# Altium PCB PCB1.PcbDoc
Units mil, origin at the board's own origin, x right, y up, seen from the top; angles counter-clockwise.
Board outline 6000 x 4000 mil, 2 copper layers (Top Layer, Bottom Layer); 48 components, 84 nets, 262 pads, 0 vias.
Unrouted connection lines stored in the file: 160.
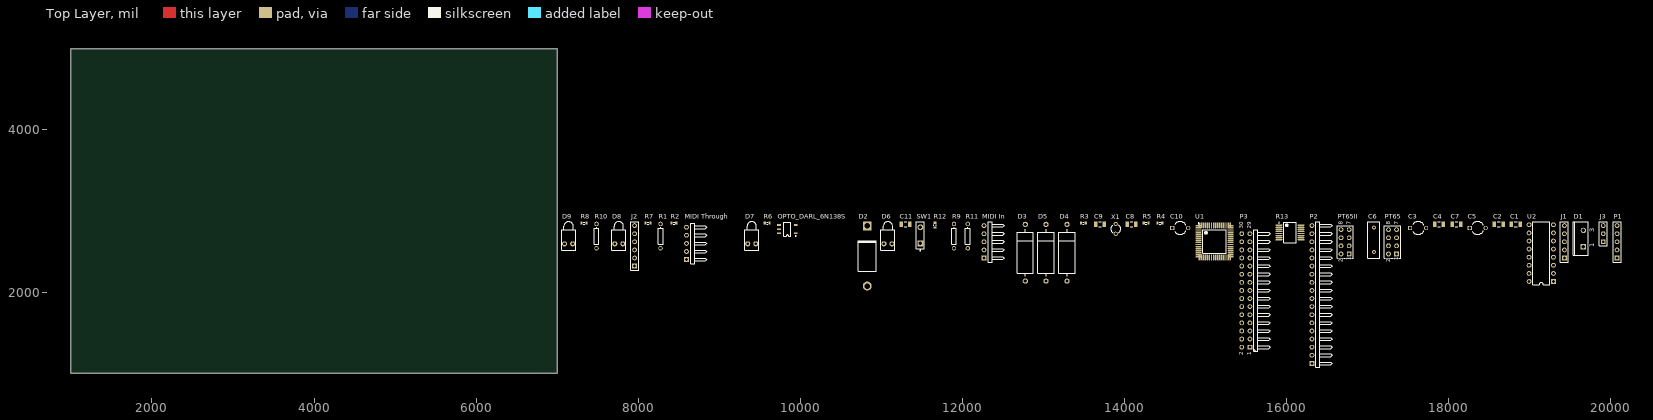
[diagram p0: Top Layer view]
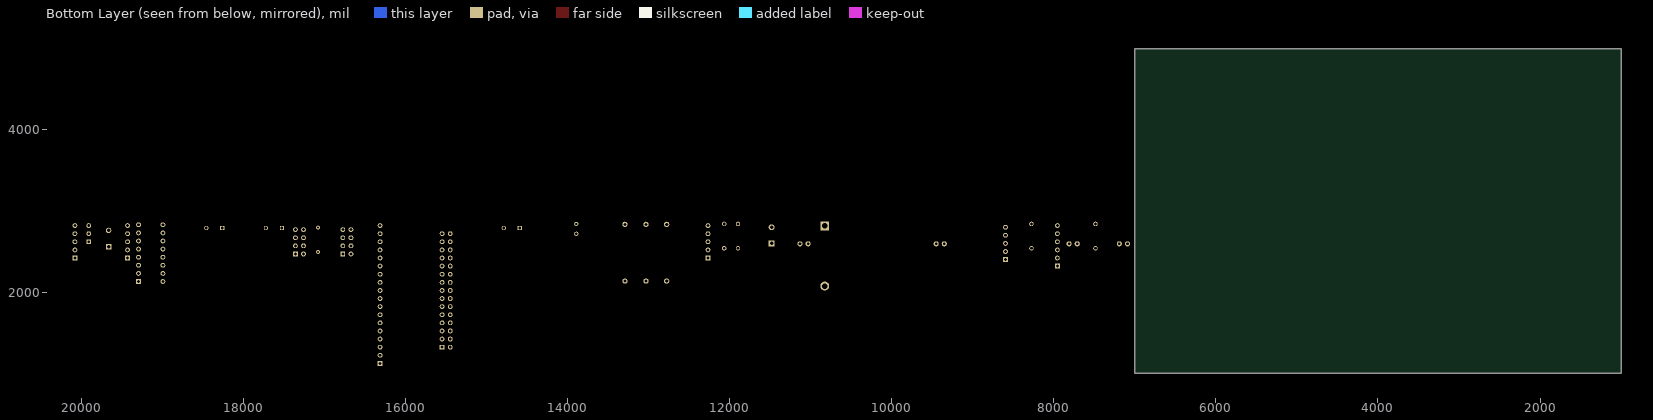
[diagram p1: Bottom Layer view, seen from below]

## Layer stack, top to bottom
Top Layer: signal copper 1.4
Dielectric: dielectric 12.6, FR-4, Dk 4.8
Bottom Layer: signal copper 1.4

## Board outline
1000,1000 7000,1000 7000,5000 1000,5000

## Design rules (kind name [scope] priority, off if disabled: settings)
Clearance [All] p1: gap=10
PolygonConnect [All] p1: connectstyle=Relief reliefconductorwidth=10 reliefentries=4 polygonreliefangle="90 Angle"
RoomDefinition Sheet2 [InComponentClass('Sheet2')] p1: confinementstyle=ConfineIn formatcopy=TRUE lockcomponents=FALSE outline 7045,1060 20135,1060 20135,2980 7045,2980
RoutingVias [All] p1: holewidth=28 width=50 viastyle="Through Hole" minholewidth=28 minwidth=50 maxholewidth=28 maxwidth=50
SilkscreenOverComponentPads [All] p1: minsilkscreentomaskgap=10
SolderMaskExpansion [All] p1: expansion=4
Width [All] p1: maxlimit=10 minlimit=10 preferedwidth=10
27 further rules are at their usual default settings.

## Components (designator, comment, footprint, x,y, rotation, side; value= is the part's Value field where it differs from the comment)
C1 "" C1206 18825,2835 r0 top
C2 "" C1206 18615,2835 r0 top
C3 "" CAPR5-4X5 17620,2790 r0 top
C4 "0.1uF" C1206 17880,2835 r0 top
C5 "4.7uF" CAPR5-4X5 18355,2790 r0 top
C6 "0.1uF" RAD-0.3 17075,2645 r90 top
C7 "0.1uF" C1206 18095,2835 r0 top
C8 "" C1206 14085,2835 r0 top
C9 "" C1206 13695,2835 r0 top
C10 "4.7uF" CAPR5-4X5 14685,2790 r0 top
C11 "" C1206 11295,2835 r0 top
D1 "1N5817" TO-220AC 19660,2660 r90 top
D2 "Diode 1N5408" DO-201AD 10825,2445 r90 top
D3 "AZ2015-01L" DIODE-0.7 12775,2485 r90 top
D4 "AZ2015-01L" DIODE-0.7 13290,2485 r90 top
D5 "AZ2015-01L" DIODE-0.7 13030,2485 r90 top
D6 "GREEN" LED-1 11080,2595 r90 top
D7 "RED" LED-1 9400,2595 r90 top
D8 "GREEN" LED-1 7760,2595 r90 top
D9 "RED" LED-1 7140,2595 r90 top
J1 "" HDR1X5 19425,2420 r90 top
J2 "CON6" HDR1X6 7955,2320 r90 top
J3 "Battery" HDR1X3 19905,2620 r90 top
"MIDI In" "Header 5H" HDR1X5H 12265,2420 r90 top
"MIDI Through" "Header 5H" HDR1X5H 8595,2400 r90 top
OPTO_DARL_6N138S "Optoisolator2" SOP5(6) 9840,2775 r90 top
P1 "Header 5" HDR1X5 20075,2420 r90 top
P2 "Header 18H" HDR1X18H 16310,1120 r90 top
P3 "Header 15X2H" HDR2X15H 15545,1320 r90 top
PT65 "PT65" HDR2X4 17355,2470 r90 top
PT65II "PT65II" HDR2X4 16770,2470 r90 top
R1 "Res1" AXIAL-0.3 8275,2690 r90 top
R2 "" J1-0603 8440,2850 r0 top
R3 "" J1-0603 13490,2850 r0 top
R4 "30" J1-0603 14435,2850 r0 top
R5 "30" J1-0603 14265,2850 r0 top
R6 "Res3" J1-0603 9590,2850 r0 top
R7 "Res3" J1-0603 8120,2850 r0 top
R8 "Res3" J1-0603 7330,2850 r0 top
R9 "Res1" AXIAL-0.3 11895,2690 r90 top
R10 "Res1" AXIAL-0.3 7485,2690 r90 top
R11 "Res1" AXIAL-0.3 12065,2690 r90 top
R12 "Res3" J1-0603 11660,2825 r90 top
R13 "Res Pack4" SSOP16_N 16040,2735 r0 top
SW1 "" SPST-2 11480,2700 r90 top
U1 "MCU" MG84FG516 15110,2625 r0 top
U2 "SN74LS165N" 648-08 19140,2480 r90 top
X1 "22.1184MHz" R38 13890,2780 r0 top

## Footprints (in the part's own frame and the unit in brackets; to place one, negate y for a bottom-side part, rotate by r counter-clockwise, add the part's x,y. Pads: shape width x height; smd on the part's side, far side on the other; paste and mask are expansions set on the pad)
648-08 [mm] "DIP; 16 Leads; Row Spacing 7.62 mm; Pitch 2.54 mm"
  rect 1.5x1.5 hole 0.9: 1(-8.89,-3.81)
  round 1.5 hole 0.9: 2(-6.35,-3.81) 3(-3.81,-3.81) 4(-1.27,-3.81) 5(1.27,-3.81) 6(3.81,-3.81) 7(6.35,-3.81) 8(8.89,-3.81) 9(8.89,3.81) 10(6.35,3.81) 11(3.81,3.81) 12(1.27,3.81) 13(-1.27,3.81) 14(-3.81,3.81) 15(-6.35,3.81) 16(-8.89,3.81)
  silkscreen extent -9.85,-2.65 9.85,2.65
AXIAL-0.3 [mm] "Axial Device, Thru-Hole; 2 Leads; 0.3 in Pin Spacing"
  round 1.4 hole 0.85: 1(-3.81,0) 2(3.81,0)
  silkscreen extent -2.77,-0.76 2.77,0.76
C1206 [mm] "Chip Capacitor, Body 3.2x1.6mm, IPC High Density"
  rect 1.1x1.7 smd: 1(-1.35,0) 2(1.35,0)
  silkscreen extent -0.4,-0.75 0.4,0.75, body extent -1.7,-0.9 1.7,0.9, height 1.3
CAPR5-4X5 [mm] "Capacitor; 2 Leads"
  rect 1.35x1.35 hole 0.8: 1(-2.5,0)
  round 1.35 hole 0.8: 2(2.5,0)
  silkscreen extent -1.69,-2 1.82,2
DIODE-0.7 [mm] "Diode, Thru-Hole; 2 Leads; 0.7 in Pin Spacing"
  round 1.65 hole 1: 1(-8.89,0) 2(8.89,0)
  silkscreen extent -7.37,-2.54 7.37,2.54
DO-201AD [mm] "Diode, Axial; Body 9.5 x 5.6 mm (LxDia. max), Lead Dia. 1.32 mm (max)"
  round 2.8 hole 1.7: 1(-9.42,0)
  rect 2.8x2.8 hole 1.7: 2(9.42,0)
  silkscreen extent -4.8,-2.8 4.9,2.8
HDR1X3 [mm] "Connector; Header; 3 Position"
  rect 1.5x1.5 hole 0.9: 1(0,0)
  round 1.5 hole 0.9: 2(2.54,0) 3(5.08,0)
  silkscreen extent -1.27,-1.27 6.35,1.27
HDR1X5 [mm] "Connector; Header; 5 Position"
  rect 1.5x1.5 hole 0.9: 1(0,0)
  round 1.5 hole 0.9: 2(2.54,0) 3(5.08,0) 4(7.62,0) 5(10.16,0)
  silkscreen extent -1.27,-1.27 11.43,1.27
HDR1X5H [mm] "Connector; Header; 5 Position; Right Angle"
  rect 1.5x1.5 hole 0.9: 1(0,0)
  round 1.5 hole 0.9: 2(2.54,0) 3(5.08,0) 4(7.62,0) 5(10.16,0)
  silkscreen extent -1.27,-6.35 11.43,-1.27
HDR1X6 [mm] "Connector; Header; 6 Position"
  rect 1.5x1.5 hole 0.9: 1(0,0)
  round 1.5 hole 0.9: 2(2.54,0) 3(5.08,0) 4(7.62,0) 5(10.16,0) 6(12.7,0)
  silkscreen extent -1.27,-1.27 13.97,1.27
HDR1X18H [mm] "Connector; Header; 18 Position; Right Angle"
  rect 1.5x1.5 hole 0.9: 1(0,0)
  round 1.5 hole 0.9: 2(2.54,0) 3(5.08,0) 4(7.62,0) 5(10.16,0) 6(12.7,0) 7(15.24,0) 8(17.78,0) 9(20.32,0) 10(22.86,0) 11(25.4,0) 12(27.94,0) 13(30.48,0) 14(33.02,0) 15(35.56,0) 16(38.1,0) 17(40.64,0) 18(43.18,0)
  silkscreen extent -1.27,-6.35 44.45,-1.27
HDR2X4 [mm] "Connector; Header; 4x2 Position"
  rect 1.5x1.5 hole 0.9: 1(0,0)
  round 1.5 hole 0.9: 2(0,2.54) 3(2.54,0) 4(2.54,2.54) 5(5.08,0) 6(5.08,2.54) 7(7.62,0) 8(7.62,2.54)
  silkscreen extent -1.27,-1.27 8.89,3.81
HDR2X15H [mm] "Connector; Header; 15x2 Position; Right Angle"
  rect 1.5x1.5 hole 0.9: 1(0,0)
  round 1.5 hole 0.9: 2(0,2.54) 3(2.54,0) 4(2.54,2.54) 5(5.08,0) 6(5.08,2.54) 7(7.62,0) 8(7.62,2.54) 9(10.16,0) 10(10.16,2.54) 11(12.7,0) 12(12.7,2.54) 13(15.24,0) 14(15.24,2.54) 15(17.78,0) 16(17.78,2.54) 17(20.32,0) 18(20.32,2.54) 19(22.86,0) 20(22.86,2.54) 21(25.4,0) 22(25.4,2.54) 23(27.94,0) 24(27.94,2.54) 25(30.48,0) 26(30.48,2.54) 27(33.02,0) 28(33.02,2.54) 29(35.56,0) 30(35.56,2.54)
  silkscreen extent -1.27,-6.35 36.83,-1.27
J1-0603 [mm] "Chip Resistor, Body 1.6x0.8mm, IPC High Density"
  rect 0.7x0.9 smd: 1(-0.75,0) 2(0.75,0)
  silkscreen extent -0.2,-0.35 0.2,0.35, body extent -0.85,-0.48 0.85,0.48, height 0.9
LED-1 [mm] "LED; 2 Leads"
  round 1.6 hole 0.8: 1(0,1.27) 2(0,-1.27)
  silkscreen extent -2,-2.2 6.95,2.2
MG84FG516 [mm]
  oval 1.85x0.45 smd: 1(-5.025,4.875) 2(-5.025,4.225) 3(-5.025,3.575) 4(-5.025,2.925) 5(-5.025,2.275) 6(-5.025,1.625) 7(-5.025,0.975) 8(-5.025,0.325) 9(-5.025,-0.325) 10(-5.025,-0.975) 11(-5.025,-1.625) 12(-5.025,-2.275) 13(-5.025,-2.925) 14(-5.025,-3.575) 15(-5.025,-4.225) 16(-5.025,-4.875) 33(5.025,-4.875) 34(5.025,-4.225) 35(5.025,-3.575) 36(5.025,-2.925) 37(5.025,-2.275) 38(5.025,-1.625) 39(5.025,-0.975) 40(5.025,-0.325) 41(5.025,0.325) 42(5.025,0.975) 43(5.025,1.625) 44(5.025,2.275) 45(5.025,2.925) 46(5.025,3.575) 47(5.025,4.225) 48(5.025,4.875)
  oval 0.45x1.85 smd: 17(-4.875,-5.025) 18(-4.225,-5.025) 19(-3.575,-5.025) 20(-2.925,-5.025) 21(-2.275,-5.025) 22(-1.625,-5.025) 23(-0.975,-5.025) 24(-0.325,-5.025) 25(0.325,-5.025) 26(0.975,-5.025) 27(1.625,-5.025) 28(2.275,-5.025) 29(2.925,-5.025) 30(3.575,-5.025) 31(4.225,-5.025) 32(4.875,-5.025) 49(4.875,5.025) 50(4.225,5.025) 51(3.575,5.025) 52(2.925,5.025) 53(2.275,5.025) 54(1.625,5.025) 55(0.975,5.025) 56(0.325,5.025) 57(-0.325,5.025) 58(-0.975,5.025) 59(-1.625,5.025) 60(-2.275,5.025) 61(-2.925,5.025) 62(-3.575,5.025) 63(-4.225,5.025) 64(-4.875,5.025)
  silkscreen extent -5.15,-3.7 3.7,5.77, body extent -3.5,-3.5 3.5,3.5, height 2.45
R38 [mm] "Crystal, Thru-Hole; 2 Leads; Body 3.1 x 8.2 mm (Dia.xH)"
  round 1.3 hole 0.7: 1(0,1.55) 2(0,-1.55)
  silkscreen extent -1.55,-1.19 1.55,1.17
RAD-0.3 [mm] "Radial Cap, Thru-Hole; 2 Leads; 0.3 in Pin Spacing"
  round 1.2 hole 0.7: 1(-3.81,0) 2(3.81,0)
  silkscreen extent -5.71,-1.91 5.71,1.91
SOP5(6) [mm] "Small Outline; 6 Leads (1 Absent); Body Width 4.4 mm; Pitch 1.27 mm"
  rect 0.6x1.2 smd: 1(-1.27,-2.6) 3(1.27,-2.6) 4(1.27,2.6) 5(0,2.6) 6(-1.27,2.6)
  silkscreen extent -2.24,-2.72 2.15,1.1
SPST-2 [mm] "Switch; 2 Leads"
  rect 1.85x1.85 hole 1.1: 1(-2.54,0)
  round 1.85 hole 1.1: 2(2.54,0)
  silkscreen extent -4.89,-1.27 4.28,1.27
SSOP16_N [mm] "SOP, 16-Leads, Body 6.2x5.3mm, Pitch 0.65mm, IPC Medium Density"
  oval 2.1x0.45 smd: 1(-3.45,2.275) 2(-3.45,1.625) 3(-3.45,0.975) 4(-3.45,0.325) 5(-3.45,-0.325) 6(-3.45,-0.975) 7(-3.45,-1.625) 8(-3.45,-2.275) 9(3.45,-2.275) 10(3.45,-1.625) 11(3.45,-0.975) 12(3.45,-0.325) 13(3.45,0.325) 14(3.45,0.975) 15(3.45,1.625) 16(3.45,2.275)
  silkscreen extent -3.57,-3.25 2,3.25, body extent -2.7,-3.25 2.7,3.25, height 2
TO-220AC [mm] "TO, Thru-Hole, Vertical, Heatsink Mounted; 3 In-Line Leads (1 Absent); Pitch 2.54 mm"
  rect 1.7x1.7 hole 1.1: 1(-2.54,0)
  round 1.7 hole 1.1: 3(2.54,0)
  silkscreen extent -5.3,-1.45 5.3,3.15

## Part data
C1 C2 C4 C7 C8 C9 C11: library part "Cap Semi", "Capacitor (Semiconductor SIM Model)"
C3 C5 C10: library part Cap2, "Capacitor"
C6: library part Cap, "Capacitor"
D1: library part "Diode 10TQ040", "Schottky Rectifier"
D2: "3 Amp Medium Power Silicon Rectifier Diode"
D3 D4 D5: library part "D Zener", "Zener Diode"
D6 D7 D8 D9: library part LED1, "Typical RED GaAs LED"
J1: library part "Header 5", "Header, 5-Pin"
J2: library part "Header 6", "Header, 6-Pin"
J3: library part "Header 3", "Header, 3-Pin"
"MIDI In" "MIDI Through": "Header, 5-Pin, Right Angle"
OPTO_DARL_6N138S: "5 Pin Mini Flat Pack Optocoupler"
P1: "Header, 5-Pin"
P2: "Header, 18-Pin, Right Angle"
P3: "Header, 15-Pin, Dual row, Right Angle"
PT65 PT65II: library part "Header 4X2", "Header, 4-Pin, Dual row"
R1 R6 R7 R8 R9 R10 R11 R12: "Resistor"
R2 R3 R4 R5: library part Res3, "Resistor"
R13: "Isolated Resistor Network"
SW1: library part SW-PB, "Switch"
U1: library part Component_1
U2: "8-Bit Parallel-to-Serial Shift Register"
X1: library part XTAL, "Crystal Oscillator"

## Nets (pads, with @x,y where several pads share a name; then routed paths per layer and width w, separated by ;. In a path a pad name is that pad's centre, name@x,y a point inside that pad or via, vN(x,y) a via of type N, cw(c..) or ccw(c..) an arc to the next point about the centre after c; other vN are vias at no path point)
GND: "MIDI Through.2" C1.1 C2.1 C3.2 C4.2 C5.2 C6.1 C7.2 C8.1 C9.1 C10.2 D3.1 D4.1 D5.1 J1.4 J1.5 J2.2 J3.2 OPTO_DARL_6N138S.5 P1.3 P1.4 P1.5 P2.9 R2.1 R3.1 R13.1 R13.2 R13.3 R13.4 R13.5 R13.6 R13.7 R13.8 U1.42 U1.54 U2.8 U2.10 U2.15
NetC1_2: C1.2 J1.2 R5.2
NetC2_2: C2.2 J1.3 R4.2
NetC4_1: C4.1 U1.56
NetC5_1: C5.1 C7.1 U1.55
NetC8_2: C8.2 U1.41 X1.2
NetC9_2: C9.2 U1.40 X1.1
NetC10_1: C10.1 U1.48
NetC11_2: C11.2 D3.2 J2.1 R2.2 SW1.2 U1.33
NetD1_3: D1.3 J3.1
NetD2_1: "MIDI In.4" D2.1 OPTO_DARL_6N138S.3
NetD2_2: D2.2 R9.2
NetD4_2: D4.2 J2.5 U1.34
NetD5_2: D5.2 J2.3 R3.2 U1.35
NetD6_2: D6.2 R12.2
NetD7_2: D7.2 R6.2
NetD8_2: D8.2 R7.2
NetD9_2: D9.2 R8.2
"NetMIDI In_5": "MIDI In.5" R9.1
"NetMIDI Through_4": "MIDI Through.4" R1.1
"NetMIDI Through_5": "MIDI Through.5" R10.1
NetOPTO_DARL_6N138S_6: OPTO_DARL_6N138S.6 R1.2 R11.1 U1.17
NetP2_1: P2.1 U1.60
NetP2_2: P2.2 U1.59
NetP2_3: P2.3 U1.58
NetP2_4: P2.4 U1.53
NetP2_5: P2.5 U1.52
NetP2_6: P2.6 U1.51
NetP2_7: P2.7 U1.50
NetP2_8: P2.8 U1.49
NetP2_10: P2.10 U1.45
NetP2_11: P2.11 U1.44
NetP2_12: P2.12 U1.43
NetP2_13: P2.13 U1.39
NetP2_14: P2.14 U1.38
NetP2_15: P2.15 U1.37
NetP2_16: P2.16 U1.24
NetP2_17: P2.17 U1.23
NetP2_18: P2.18 U1.22
NetP3_1: P3.1 U1.36
NetP3_2: P3.2 U1.62
NetP3_3: P3.3 U1.32
NetP3_4: P3.4 U1.1
NetP3_5: P3.5 U1.31
NetP3_6: P3.6 U1.2
NetP3_7: P3.7 U1.30
NetP3_8: P3.8 U1.3
NetP3_9: P3.9 U1.29
NetP3_10: P3.10 U1.4
NetP3_11: P3.11 U1.28
NetP3_12: P3.12 U1.9
NetP3_13: P3.13 U1.27
NetP3_14: P3.14 U1.10
NetP3_15: P3.15 U1.26
NetP3_16: P3.16 U1.11
NetP3_17: P3.17 U1.25
NetP3_18: P3.18 U1.12
NetP3_19: P3.19 U1.21
NetP3_20: P3.20 U1.13
NetP3_21: P3.21 R12.1 U1.5
NetP3_22: P3.22 U1.14
NetP3_23: P3.23 R6.1 U1.6
NetP3_24: P3.24 U1.15
NetP3_25: P3.25 R7.1 U1.7
NetP3_26: P3.26 U1.16
NetP3_27: P3.27 R8.1 U1.8
NetP3_28: P3.28 U1.18
NetP3_29: P3.29 U1.20
NetP3_30: P3.30 U1.19
NetPT65_1: PT65.1 R13.16 U2.11
NetPT65_2: PT65.2 R13.15 U2.12
NetPT65_4: PT65.4 R13.14 U2.13
NetPT65_8: PT65.8 R13.13 U2.14
NetPT65II_1: PT65II.1 R13.12 U2.3
NetPT65II_2: PT65II.2 R13.11 U2.4
NetPT65II_4: PT65II.4 R13.10 U2.5
NetPT65II_8: PT65II.8 R13.9 U2.6
NetR4_1: R4.1 U1.47
NetR5_1: R5.1 U1.46
NetU1_61: U1.61 U2.1
NetU1_63: U1.63 U2.9
NetU1_64: U1.64 U2.2
VCC: C3.1 C6.2 D1.1 J1.1 P1.1 P1.2 R10.2 R11.2 U1.57 U2.16
VDD: C11.1 D6.1 D7.1 D8.1 D9.1 J2.4 SW1.1
pads on no net: "MIDI In.1" "MIDI In.2" "MIDI In.3" "MIDI Through.1" "MIDI Through.3" J2.6 J3.3 OPTO_DARL_6N138S.1 OPTO_DARL_6N138S.4 PT65.3 PT65.5 PT65.6 PT65.7 PT65II.3 PT65II.5 PT65II.6 PT65II.7 U2.7

## Text inside footprints (layer, text, board x,y; h text height)
D1: Top Overlay "1" at 19794.84,2550.16 h59.06 r90; Top Overlay "3" at 19794.84,2740.32 h59.06 r90
P3: Top Overlay "30" at 15465,2780 h50 r90; Top Overlay "29" at 15565,2780 h50 r90; Top Overlay "1" at 15565,1220 h50 r90; Top Overlay "2" at 15465,1220 h50 r90
PT65: Top Overlay "2" at 17275,2370 h50 r90; Top Overlay "1" at 17375,2390 h50 r90; Top Overlay "7" at 17375,2830 h50 r90; Top Overlay "8" at 17275,2830 h50 r90
PT65II: Top Overlay "2" at 16690,2370 h50 r90; Top Overlay "1" at 16790,2390 h50 r90; Top Overlay "7" at 16790,2830 h50 r90; Top Overlay "8" at 16690,2830 h50 r90